# Altium PCB ╨Р╨С╨Т╨У.201905.010.PcbDoc
Units mm, origin at the board's own origin, x right, y up, seen from the top; angles counter-clockwise.
Board outline 57.4 x 29.78 mm, 2 copper layers (Top Layer, Bottom Layer), stack 1.569 mm thick; 24 components, 19 nets, 77 pads, 22 vias.
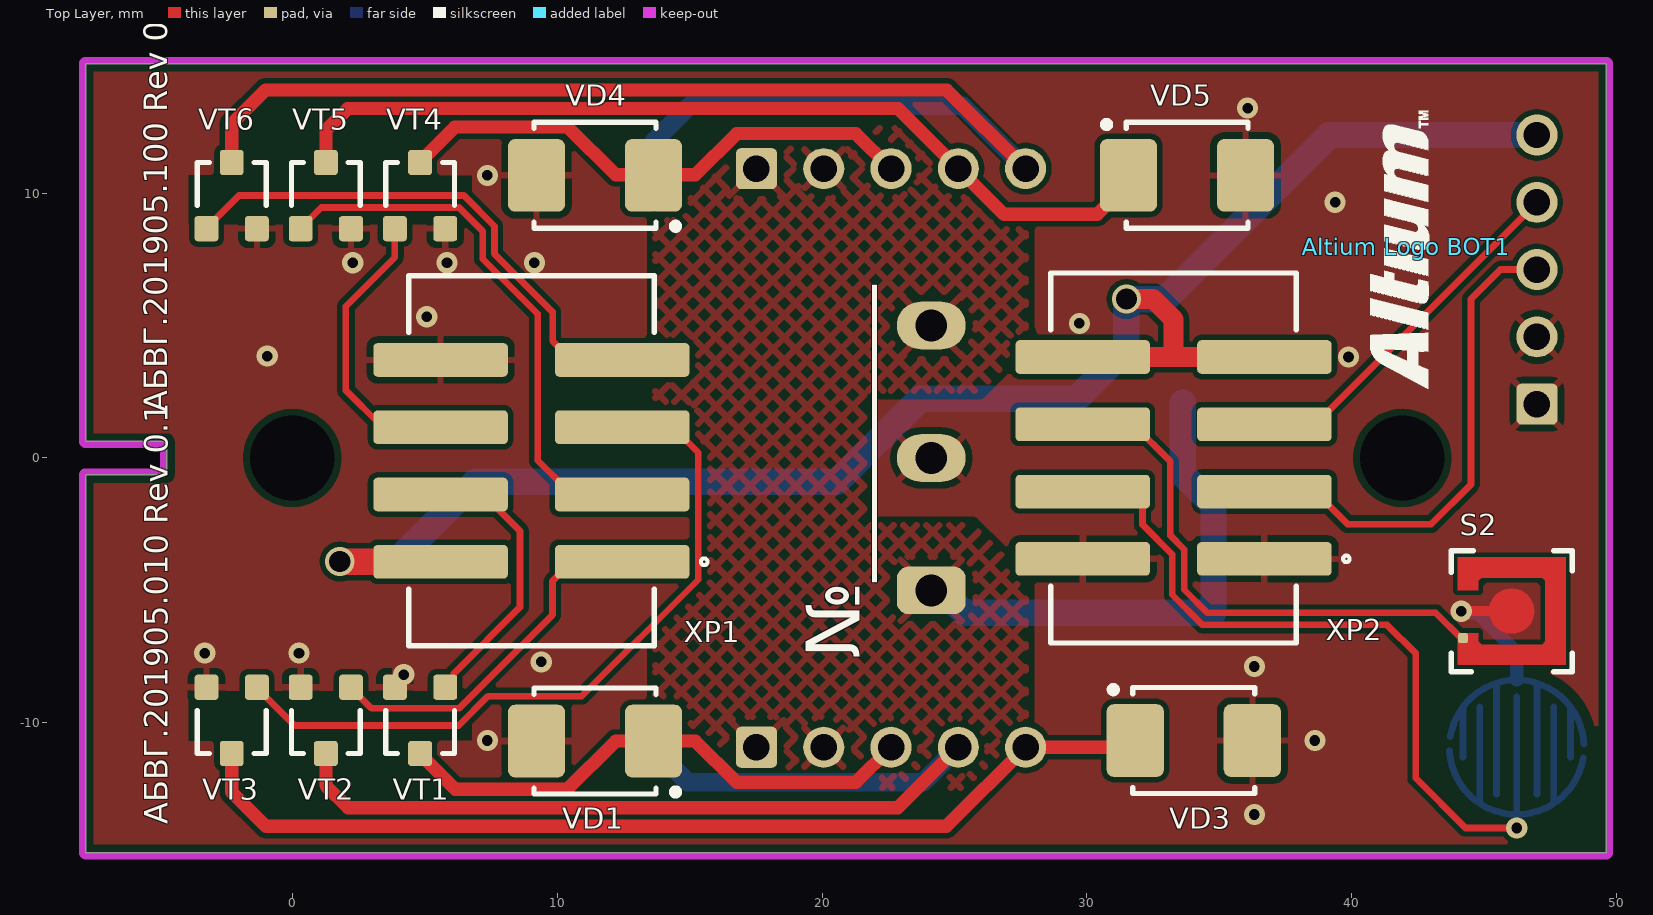
[diagram p0: Top Layer view]
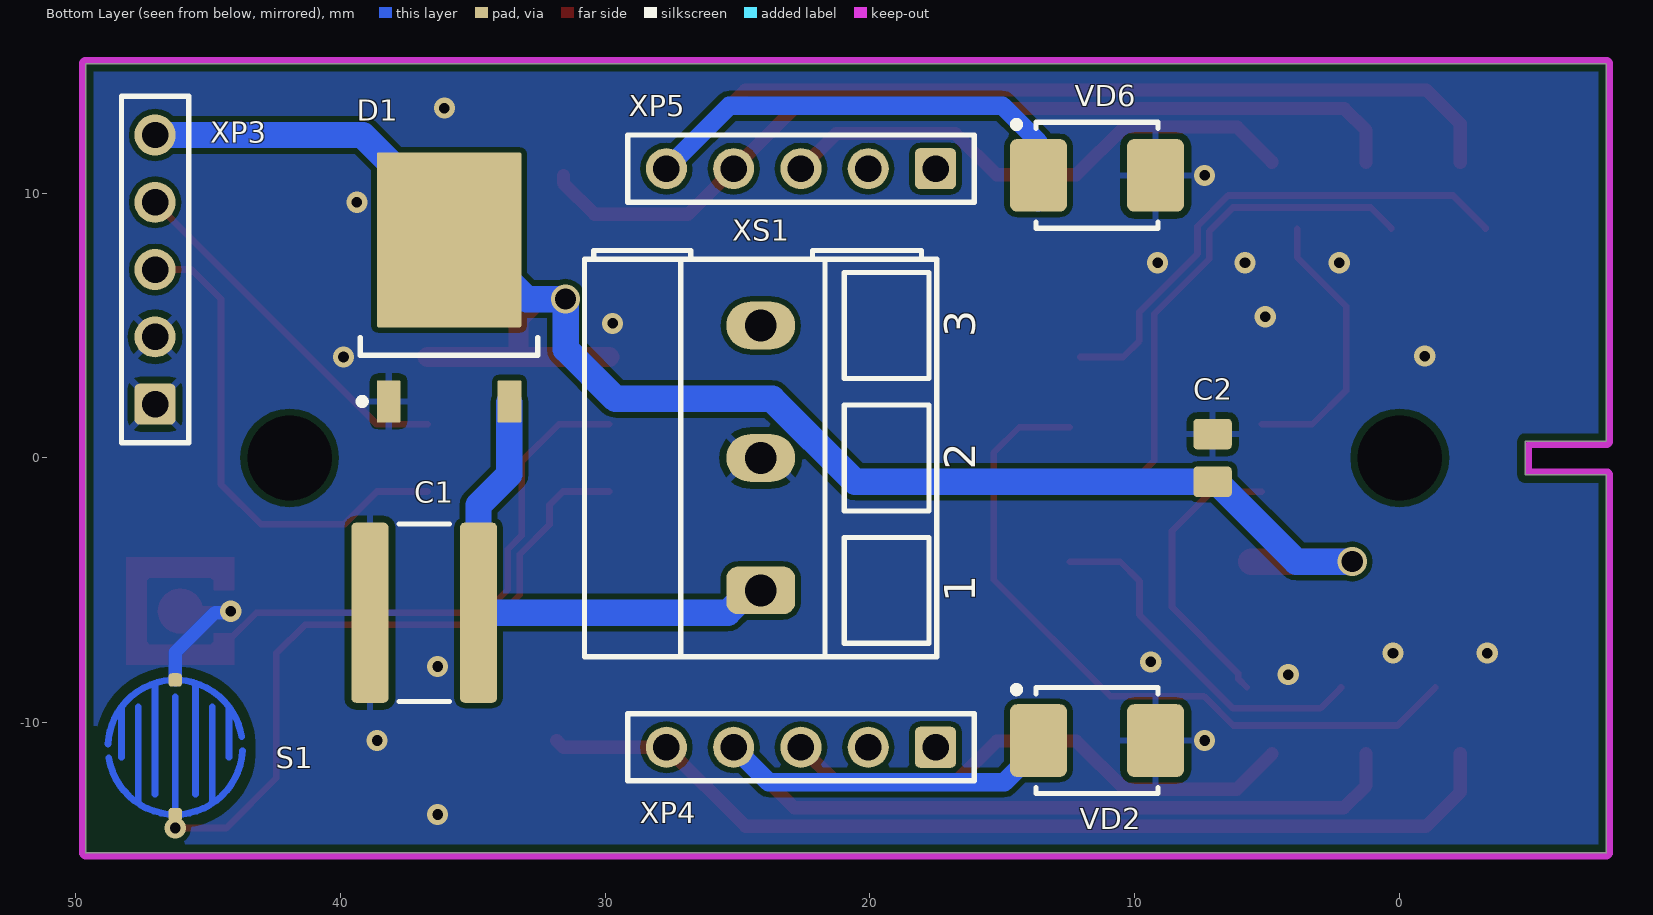
[diagram p1: Bottom Layer view, seen from below]
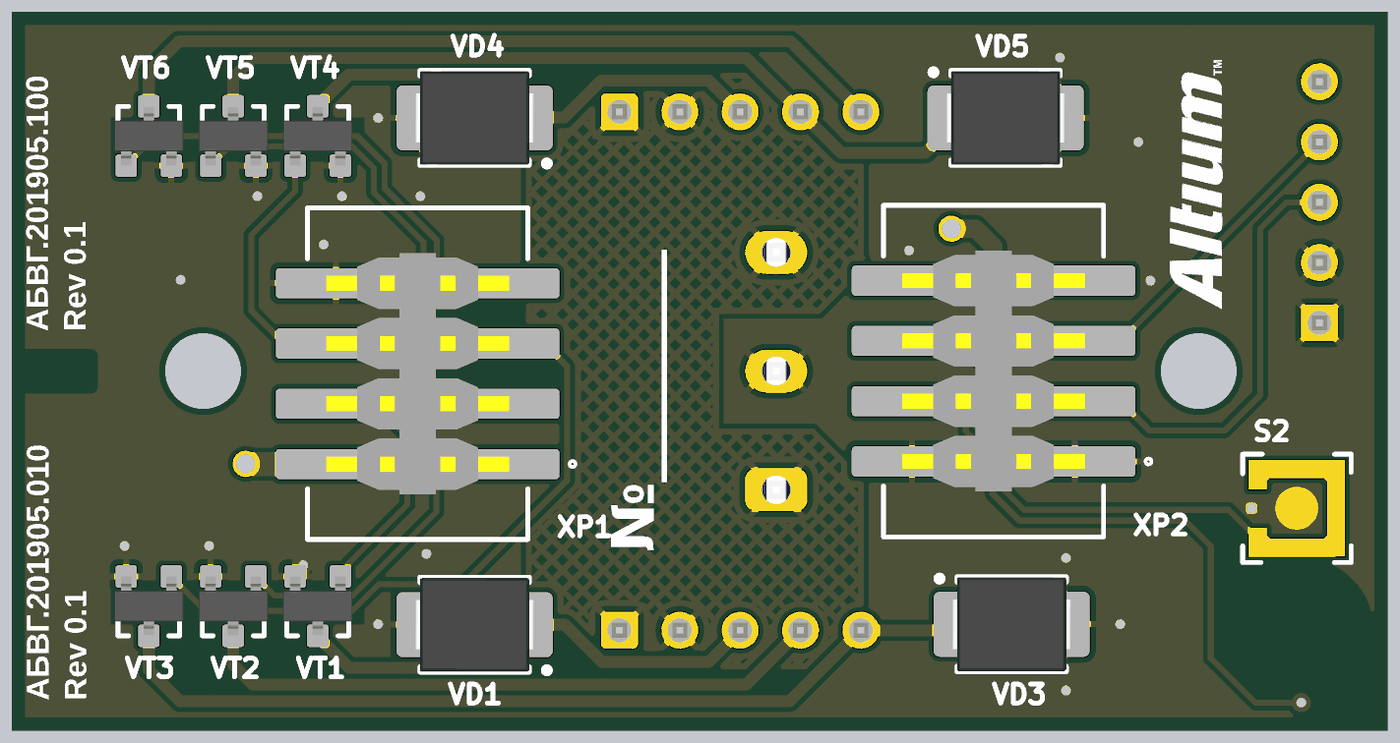
[diagram p2: 3D render of the assembled board from above, using the file's embedded part models]
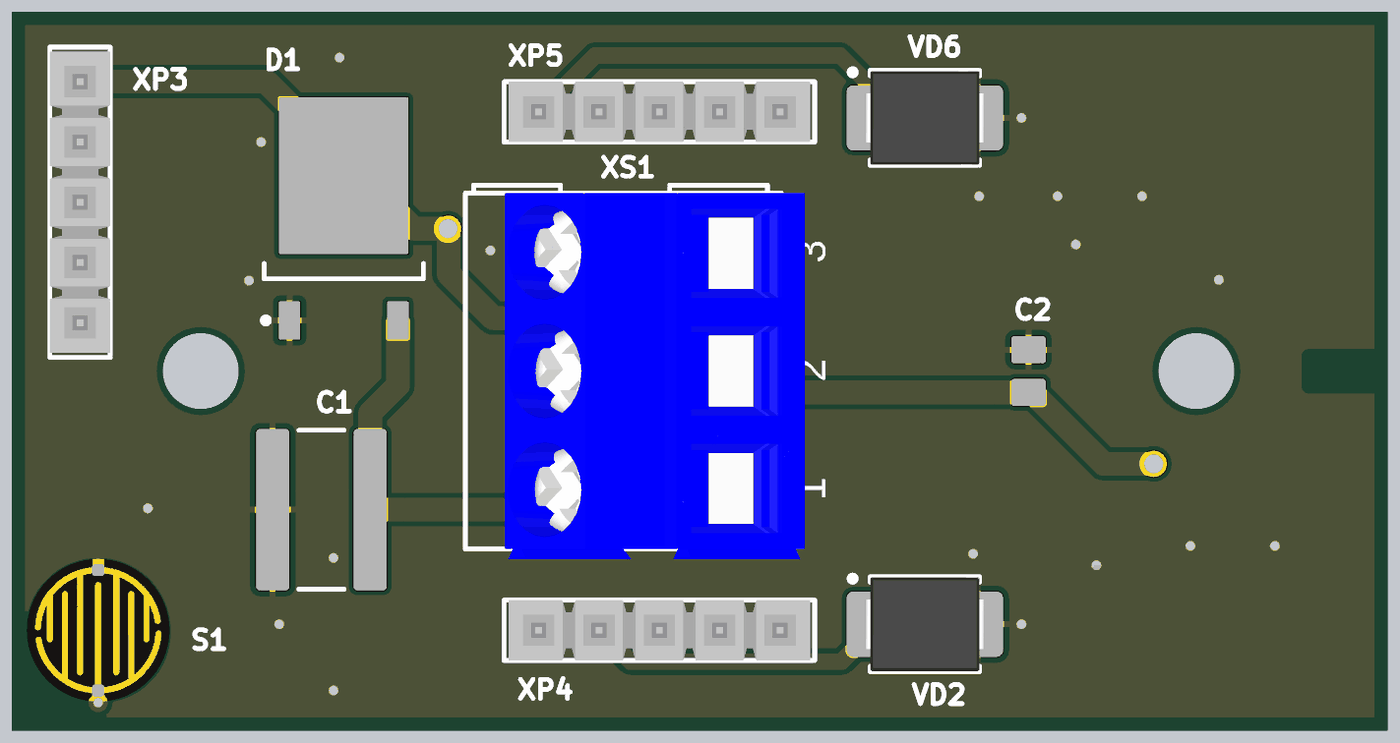
[diagram p3: 3D render of the assembled board from below, using the file's embedded part models]

## Layer stack, top to bottom
Top Solder: solder mask 0.0102, Solder Resist, Dk 3.5
Top Layer: signal copper 0.035
Dielectric 1: core 1.4986, Core-043, Dk 4.3
Bottom Layer: signal copper 0.035
Bottom Solder: solder mask 0.0102, Solder Resist, Dk 3.5

## Board outline
49.6,-14.899 49.608,0 49.608,14.883 -7.796,14.883 -7.796,0.627 -4.729,0.627 -4.729,-0.643 -7.796,-0.643 -7.796,-14.899

## Design rules (kind name [scope] priority, off if disabled: settings)
AssemblyTestPointUsage [All] p1 off:
AssemblyTestpoint [All] p1 off: testpointundercomponent=TRUE minsize=1.016 maxsize=2.54 preferedsize=1.524 minholesize=0 maxholesize=1.016 preferedholesize=0.813 testpointgrid=0.025 usegrid=TRUE gridtolerance=0 allowsidetop=TRUE allowsidebottom=TRUE
BoardOutlineClearance [All] p1: gap=0.25 ignorepadtopadclearanceinfootprint=FALSE except(0: Arc-SplitContinuation Track-SplitContinuation SMDPad-SplitContinuation THPad-SplitContinuation Via-SplitContinuation Fill-SplitContinuation Poly-SplitContinuation Region-SplitContinuation Text-SplitContinuation; 0.3: Poly-OutlineEdge)
Clearance "Clearance-All_1Oz (35mkm)" [All] p1: gap=0.2 ignorepadtopadclearanceinfootprint=TRUE except(0.25: Arc-Hole Track-Hole SMDPad-Hole THPad-Hole Via-Hole Fill-Hole Poly-Hole Region-Hole Text-Hole) // Общий зазор для фольги 35 мкм
ComponentClearance ComponentClearance_0.25mm [All] p1: gap=0.25 collisioncheckmode=3 verticalgap=0.25 showdistances=FALSE
DiffPairsRouting [All] p1 off: maxlimit=0.254 minlimit=0.254 mostfreqgap=0.254 toplayer_minwidth=0.381 toplayer_maxwidth=0.381 toplayer_prefwidth=0.381 bottomlayer_minwidth=0.381 bottomlayer_maxwidth=0.381 bottomlayer_prefwidth=0.381 maxuncoupledlength=12.7
FabricationTestPointUsage [All] p1 off: valid=0 allowmultiple=FALSE
FabricationTestpoint [All] p1 off: side=3 testpointundercomponent=TRUE minsize=1.016 maxsize=2.54 preferedsize=1.524 minholesize=0 maxholesize=1.016 preferedholesize=0.813 testpointgrid=0.025 allowsidetop=TRUE allowsidebottom=TRUE usegrid=TRUE gridtolerance=0
HoleSize [All] p1: absolutevalues=TRUE maxlimit=5 minlimit=0.3 maxpercent=80.000 minpercent=20.000
HoleToHoleClearance [All] p1: gap=0.25 allowstackedmicrovias=TRUE
MinimumSolderMaskSliver [All] p1: minsoldermaskwidth=0.25
NetAntennae [InComponent('S1')] p1: netantennaetolerance=10
PasteMaskExpansion [All] p1 off: expansion=0
PlaneClearance [All] p1 off: clearance=0.508
PlaneConnect [All] p1 off: planeconnectstyle=Relief reliefexpansion=0.508 reliefentries=4 reliefconductorwidth=0.254 reliefairgap=0.254
PolygonConnect PolygonConnect_All [All] p1: thpad.connectstyle=Relief thpad.reliefconductorwidth=0.25 thpad.reliefentries=4 thpad.polygonreliefangle="45 Angle" thpad.airgapwidth=0.25 smdpad.connectstyle=Relief smdpad.reliefconductorwidth=0.25 smdpad.reliefentries=4 smdpad.polygonreliefangle="90 Angle" smdpad.airgapwidth=0.25 via.connectstyle=Direct via.reliefconductorwidth=0.254 via.reliefentries=4 via.polygonreliefangle="90 Angle" via.airgapwidth=0.254
RoomDefinition Stabilizer [InComponentClass('Stabilizer')] p1: confinementstyle=ConfineIn formatcopy=TRUE lockcomponents=TRUE outline 5.793,-2.025 5.793,2.025 15.1,2.025 15.1,8.525 31.966,8.525 31.966,12.257 39.816,12.257 39.816,-1.917 40.105,-1.917 40.105,-9.767 33.555,-9.767 33.555,-8.775 15.1,-8.775 15.1,-2.025
RoutingCorners [All] p1 off: cornerstyle=45-Degree minsetback=2.5 maxsetback=2.5
RoutingPriority [All] p1 off: routingpriority=0
RoutingVias [All] p1: holewidth=0.305 width=0.559 viastyle="Through Hole" minholewidth=0.305 minwidth=0.559 maxholewidth=0.711 maxwidth=1.27 useviatemplates=TRUE viatemplateguid#1={DFEAECEF-EB07-48F7-AC79-42AC97957FC0} viatemplateguid#2={1BCE533F-170D-4028-B366-33B5D49D47F2} viatemplatename#1=v80h40m0mx0(Tol0-13) viatemplatename#2=v110h80(Tol10-10)
SilkToSilkClearance [All] p1: silktosilkclearance=0.2
SilkToSolderMaskClearance [IsPad] p1: minsilkscreentomaskgap=0.25 clearancetoexposedcopper=TRUE
SolderMaskExpansion [All] p1: expansion=0.05
Width Width_S1_0.254 [InComponent('S1') Or InComponent('S2')] p1: maxlimit=0.4 minlimit=0.254 preferedwidth=0.254 // Исключение правила ширины проводника цепи GND
Width Width_NetClass(Power)_1.0mm [InNetClass('Power')] p2: maxlimit=1 minlimit=0.5 preferedwidth=1 // Ширина проводников для класса цепей Power
Width Width_NetClass(LOAD)_0.7mm [InNetClass('Load')] p3: maxlimit=0.7 minlimit=0.5 preferedwidth=0.5 // Ширина проводников для класса цепей LOAD
Width Width_InNetClass(PWN)_0.25mm [InNetClass('PWMN_[0..2]')or(InNetClass('PWMP_[0..2]'))] p4: maxlimit=0.25 minlimit=0.25 preferedwidth=0.25 // Ширина проводников для классов цепей PWN
Width "Width-All_1Oz (35mkm)" [All] p5: maxlimit=10 minlimit=0.15 preferedwidth=0.2 // Общая ширина проводника для фольги 35 мкм
13 further rules are at their usual default settings.

## Classes and differential pairs
component class Stabilizer: C1 C2 D1 XS1
net class Load: NetVD1_1 NetVD2_1 NetVD3_1 NetVD4_1 NetVD5_1 NetVD6_1
net class Power: GND VCC VIN
net class PWMP_[0..2]: PWMP0 PWMP1 PWMP2 PWMP_0 PWMP_1 PWMP_2
net class PWMN_[0..2]: PWMN0 PWMN1 PWMN2 PWMN_0 PWMN_1 PWMN_2

## Components (designator, comment, footprint, x,y, rotation, side; value= is the part's Value field where it differs from the comment)
"Altium Logo BOT1" "Altium(2009)" LOGO-ALTIUM-NEW 42.05,7.975 r90 top
C1 "1825 1 uF 25 V ±10 %  X7R" CAPC1825(4564)220_N 36.83,-5.842 r0 bottom value=1uF
C2 "220nF 6.3V 0805(2012)" CAPC0805(2012)100_N 7.068,0 r270 bottom value=220nF
D1 "LM1117DTX-5.0/NOPB" NDP0003B_L 35.891,6.432 r90 bottom
S1 "KNOPKA" ELASTO_5.08MM 46.228,-10.922 r180 bottom
S2 "KNOPKA_2" DOME_SQ04200N 46.042,-5.784 r180 top
VD1 "P6SMB27AT3G" ONSC-SMB-2-403A-03_J_V 11.43,-10.687 r180 top
VD2 "P6SMB27AT3G" ONSC-SMB-2-403A-03_J_V 11.43,-10.668 r180 bottom
VD3 "P6SMB27AT3G" ONSC-SMB-2-403A-03_J_V 34.036,-10.668 r0 top
VD4 "P6SMB27AT3G" ONSC-SMB-2-403A-03_J_V 11.43,10.668 r180 top
VD5 "P6SMB27AT3G" ONSC-SMB-2-403A-03_J_V 33.782,10.668 r0 top
VD6 "P6SMB27AT3G" ONSC-SMB-2-403A-03_J_V 11.43,10.668 r180 bottom
VT1 "AO3400A" AO-SOT23-3_V 4.826,-9.906 r180 top
VT2 "AO3400A" AO-SOT23-3_V 1.27,-9.906 r180 top
VT3 "AO3400A" AO-SOT23-3_V -2.286,-9.906 r180 top
VT4 "AO3400A" AO-SOT23-3_V 4.826,9.906 r0 top
VT5 "AO3400A" AO-SOT23-3_V 1.27,9.906 r0 top
VT6 "AO3400A" AO-SOT23-3_V -2.286,9.906 r0 top
XP1 "TSM-104-04-T-DV" TSM-104-04-T-DV 9.03,-0.11 r90 top
XP2 "TSM-104-04-T-DV" TSM-104-04-T-DV 33.274,0 r90 top
XP3 "TSW-105-05-T-S" SMTC-TSW-105-05-X-S 46.99,2.032 r90 bottom
XP4 "TSW-105-05-T-S" SMTC-TSW-105-05-X-S 17.526,-10.922 r0 bottom
XP5 "TSW-105-05-T-S" SMTC-TSW-105-05-X-S 17.526,10.922 r0 bottom
XS1 "691213710003" ETB15-3 24.125,0 r90 bottom

## Footprints (in the part's own frame and the unit in brackets; to place one, negate y for a bottom-side part, rotate by r counter-clockwise, add the part's x,y. Pads: shape width x height; smd on the part's side, far side on the other; paste and mask are expansions set on the pad)
AO-SOT23-3_V [mm]
  rrect25% 0.9x0.95 smd: D(0,1.25) G(-0.95,-1.25) S(0.95,-1.25)
  silkscreen extent -1.3,-0.38 1.3,1.25, body extent -1.46,-1.25 1.46,1.23, height 1.02
CAPC0805(2012)100_N [mm]
  rrect25% 1.15x1.45 smd: 1(-0.9,0) 2(0.9,0)
  body extent -1.1,-0.72 1.1,0.73, height 1
CAPC1825(4564)220_N [mm]
  rrect25% 1.4x6.8 smd: 1(-2.05,0) 2(2.05,0)
  silkscreen extent -0.95,-3.35 0.95,3.35, body extent -2.4,-3.4 2.4,3.4, height 2.2
DOME_SQ04200N [mm]
  rrect50% 0.38x0.38 smd paste-0.38: 1(1.905,0) 2(1.841,1.016)
  Top Layer region: -0.845,-0.004 -0.731,0.421 -0.42,0.732 0.005,0.846 0.43,0.732 0.741,0.421 0.855,-0.004 0.855,-0.004 0.771,-0.373 0.535,-0.669 0.194,-0.833 -0.184,-0.833 -0.525,-0.669 -0.761,-0.373 -0.845,-0.004
  Top Layer region: -2.03,2.03 -2.03,-2.03 2.032,-2.03 2.032,-0.794 1.27,-0.794 1.27,-1.143 1.143,-1.27 -1.143,-1.27 -1.27,-1.143 -1.27,1.143 -1.143,1.27 1.143,1.27 1.27,1.143 1.27,0.826 2.032,0.826 2.032,2.032
  Top Layer lines w0.38: 1.905,0 0,0
  silkscreen extent -2.28,-2.28 2.28,2.28
ELASTO_5.08MM [mil]
  rrect50% 20x20 smd: 1(0,100) 2(0,-100)
  Top Layer region: -10,185
  Top Layer region: 0,0
  Top Layer region: -99.88,4.99
  Top Layer lines w10: 99.88,-4.99 cw(c0,0) 0,-100 ; 98.78,15.6 ccw(c0,0) 80,60 ; 80,-15 80,60 ; 55,-80 55,60 ; 30,-70 30,95 ; 0,75 0,-100 ; -30,-70 -30,95 ; -55,-80 -55,60 ; -80,-15 -80,60 ; -98.78,-15.6 ccw(c0,0) 0,-100 ; -99.88,4.99 cw(c0,0) -80,60 ; 80,60 ccw(c0,0) -80,60
  Multi-Layer pour cut-out: -120,-5 -120,0 -110.87,45.92 -84.85,84.85 -45.92,110.87 0,120 0,120 45.92,110.87 84.85,84.85 110.87,45.92 120,0 120,0 120,-5 111.25,-49.01 86.32,-86.32 49.01,-111.25 5,-120 5,-120 -5,-120 -49.01,-111.25 -86.32,-86.32 -111.25,-49.01 -120,-5
ETB15-3 [mm]
  rrect50% 1.8x2.6 hole 1.2: 1(-5,0)
  oval 1.8x2.6 hole 1.2: 2(0,0) 3(5,0)
  silkscreen extent -7.5,-6.65 7.83,6.65, body extent -7.93,-7.65 7.5,5, height 15.45
LOGO-ALTIUM-NEW [mm]
  silkscreen extent -5.36,-0.87 5.14,1.36
NDP0003B_L [mm] "D-PAK, 4-Leads, Body 6.1x6.6mm, Pitch 2.29mm, Lead Span 9.7mm, IPC High Density"
  rrect11% 1.6x0.9 smd: 1(-4.3,2.28) 3(-4.3,-2.28)
  rrect2% 6.6x5.45 smd: 4(1.8,0)
  silkscreen extent -4.42,-3.35 -1.9,3.4, body extent -2.55,-3.35 3.65,3.35, height 2.38
ONSC-SMB-2-403A-03_J_V [mm]
  rrect25% 2.159x2.743 smd: 1(-2.21,0) 2(2.21,0)
  silkscreen extent -3.16,-2 2.3,2.05, body extent -2.52,-1.97 2.52,1.98, height 2.47
SMTC-TSW-105-05-X-S [mm]
  rrect25% 1.55x1.55 hole 1: 1(0,0)
  round 1.55 hole 1: 2(2.54,0) 3(5.08,0) 4(7.62,0) 5(10.16,0)
  silkscreen extent -1.46,-1.27 11.62,1.27, body extent -1.27,-1.27 11.43,1.27, height 5.21
TSM-104-04-T-DV [mm]
  rrect25% 1.27x5.08 smd: 1(-3.81,-3.43) 2(-3.81,3.43) 3(-1.27,-3.43) 4(-1.27,3.43) 5(1.27,-3.43) 6(1.27,3.43) 7(3.81,-3.43) 8(3.81,3.43)
  silkscreen extent -6.98,-6.65 6.98,4.63, body extent -5.08,-3.85 5.08,3.85, height 6.86

## Part data
"Altium Logo BOT1": library part CMP-9999-00125-1, "Alitum Logo"
C1: library part VJ1825Y105KXXAT, "Керамический чип-конденсатор", Case/Package=1825, Dielectric=X7R, Manufacturer=Vishay, Max Operating Temperature=150°C, Min Operating Temperature=-55°C, Tolerance=10%, Voltage Rating=25V, ClassName=Stabilizer, ComponentLink2Description=http://datasheet.octopart.com/VJ1825Y105KXXAT-Vishay-datasheet-14932079.pdf, ComponentLink2URL=http://datasheet.octopart.com/VJ1825Y105KXXAT-Vishay-datasheet-14932079.pdf, Depth=6.4mm, Lead Free="Lead Free", Length=4.5mm, Manufacturer Part Number=VJ1825Y105KXXAT, Mount="Surface Mount", Stock 1=0, Supplier 1=Avnet, Supplier Part Number 1=VJ1825Y105KXXAT, Voltage Rating (DC)=25V
C2: library part LLM215R70J224MA11L, "Керамический чип-конденсатор", Case/Package=0805, Case Code (Metric)=2012, Dielectric=X7R, Manufacturer=Murata, Max Operating Temperature=125°C, Min Operating Temperature=-55°C, Package Quantity=1, Supplier Part Number 1=81-LLM215R70J224MA1L, Tolerance=20%, Voltage Rating=6.3V, Case Code (Imperial)=0805, ClassName=Stabilizer, ComponentLink9Description=http://datasheet.octopart.com/LLM215R70J224MA11L-Murata-datasheet-11978611.pdf, ComponentLink9URL=http://datasheet.octopart.com/LLM215R70J224MA11L-Murata-datasheet-11978611.pdf, Depth=1.25mm, Height=0.5mm, Lead Free="Lead Free", Length=2mm, Manufacturer Part Number=LLM215R70J224MA11L, Mount="Surface Mount", Packaging="Tape and Reel", Radiation Hardening=No, Stock 1=3598, Supplier 1=Mouser, Termination=SMD/SMT, Thickness=0.022inch, Voltage Rating (DC)=6.3V, Width=0.049inch
D1: "LDO Regulator Pos 5V 0.8A 3-Pin(2+Tab) TO-252 T/R", Case/Package=TO-252, Dropout Voltage=1.2V, Manufacturer="TI National Semiconductor", Max Input Voltage=15V, Max Operating Temperature=125°C, Max Output Current=800mA, Min Operating Temperature=-40°C, Nominal Output Voltage=5V, Output Voltage Accuracy=1%, Package Quantity=2500, Quiescent Current=10mA, Accuracy=1%, ClassName=Stabilizer, ComponentLink1Description=https://datasheet.ciiva.com/39121/1280534-39121523.pdf?src-supplier=Jameco, ComponentLink1URL=https://datasheet.ciiva.com/39121/1280534-39121523.pdf?src-supplier=Jameco, Contact Plating=Tin, Lead Free="Lead Free", Manufacturer Part Number=LM1117DTX-5.0/NOPB, Min Current Limit=800mA, Mount="Surface Mount", Number of Outputs=1, Number of Pins=3, Number of Regulators=1, Output Current=800mA, Output Type=Fixed, Output Voltage=5V, Packaging="Tape and Reel", Polarity=Positive, Radiation Hardening=No, REACH SVHC="No SVHC", Stock 1=2500, Supplier 1=Arrow, Supplier Part Number 1=LM1117DTX-5.0/NOPB
S1 S2: Manufacturer Part Number=Сенсор
VD1 VD2 VD3 VD4 VD5 VD6: "TVS DIODE 23.1V 37.5V SMB", Breakdown Voltage=27V, Case/Package=SMB, Clamping Voltage=37.5V, Current Rating=16A, Leakage Current=5uA, Manufacturer="ON Semiconductor", Max Breakdown Voltage=28.4V, Max Operating Temperature=150°C, Min Breakdown Voltage=25.7V, Min Operating Temperature=-65°C, Operating Supply Voltage=23.1V, Package Quantity=1, Peak Pulse Power=600W, Power Line Protection=No, Test Current=1mA, ComponentLink1Description=https://datasheet.ciiva.com/3021/p6smb6-8at3-d-3021361.pdf?src-supplier=Avnet, ComponentLink1URL=https://datasheet.ciiva.com/3021/p6smb6-8at3-d-3021361.pdf?src-supplier=Avnet, Composition=Zener, Contact Plating=Tin, Depth=3.56mm, Direction=Unidirectional, Element Configuration=Single, ESD Protection=Yes, Height=2.13mm, Lead Free="Lead Free", Length=4.32mm, Manufacturer Part Number=P6SMB27AT3G, Max Reverse Leakage Current=5uA, Max Surge Current=16A, Number of Channels=1, Number of Elements=1, Number of Pins=2, Number of Unidirectional Channels=1, Packaging="Tape and Reel", Peak Pulse Current=16A, Polarity=Unidirectional, Power Dissipation=600W, Radiation Hardening=No, REACH SVHC="No SVHC", Reverse Breakdown Voltage=25.7V, Reverse Standoff Voltage=23.1V, Stock 1=0, Supplier 1=Avnet, Supplier Part Number 1=P6SMB27AT3G, Termination=SMD/SMT, Voltage Rating (DC)=27V, Width=3.56mm
VT1 VT2 VT3 VT4 VT5 VT6: "MOSFET N-CH 30V 5.7A SOT23", Case/Package=SOT-23, Continuous Drain Current (ID)=5.7A, Drain to Source Voltage (Vdss)=30V, Gate to Source Voltage (Vgs)=12V, Input Capacitance=630pF, Manufacturer="Alpha & Omega Semiconductor", Max Operating Temperature=150°C, Max Power Dissipation=1.4W, Min Operating Temperature=-55°C, Supplier Part Number 1=785-1000-1-ND, ComponentLink1Description=https://datasheet.ciiva.com/940/ao3400a-940739.pdf?src-supplier=Digi-Key, ComponentLink1URL=https://datasheet.ciiva.com/940/ao3400a-940739.pdf?src-supplier=Digi-Key, Lead Free="Lead Free", Manufacturer Part Number=AO3400A, Mount="Surface Mount", Number of Elements=1, Number of Pins=3, Packaging="Tape and Reel", Power Dissipation=1.4W, Radiation Hardening=No, Rds On Max=26.5mR, Stock 1=660154, Supplier 1=Digi-Key
XP1 XP2: "SAMTEC  Board-To-Board Connector,  / TSM Series, 8 Contacts, Header, 2.54 mm, / Surface Mount, 2 Rows", Manufacturer=Samtec, Manufacturer Part Number=TSM-104-04-T-DV.1, Supplier Part Number 1=200-TSM10404TDV, ComponentLink1Description=http://www.farnell.com/datasheets/1927672.pdf?src-supplier=Farnell, ComponentLink1URL=http://www.farnell.com/datasheets/1927672.pdf?src-supplier=Farnell, ComponentLink2Description=http://www.samtec.com/documents/webfiles/pdf/TSM.PDF?src-supplier=Avnet+Europe, ComponentLink2URL=http://www.samtec.com/documents/webfiles/pdf/TSM.PDF?src-supplier=Avnet+Europe, ComponentLink3Description=http://www.samtec.com/documents/webfiles/pdf/TSM.PDF?src-supplier=Avnet, ComponentLink3URL=http://www.samtec.com/documents/webfiles/pdf/TSM.PDF?src-supplier=Avnet, Contact Material=Bronze, Contact Plating=Tin, Gender=Male, Lead Free="Lead Free", Mount="Surface Mount", Number of Contacts=8, Number of Rows=2, Packaging=Bulk, Pitch=2.54mm, Radiation Hardening=No, REACH SVHC="No SVHC", Stock 1=283, Supplier 1=Mouser, Termination=Solder
XP3 XP4 XP5: "TSW - Samtec 2.54mm Pin Header 13.46mm Overall Pin Length 5.08mm Tail (08)", Color=Black, Manufacturer=Samtec, Max Current Rating=7.6A, Max Operating Temperature=125°C, Max Voltage Rating (AC)=550V, Min Operating Temperature=-55°C, Package Quantity=1, Supplier Part Number 1=200-TSW10508SD, ComponentLink4Description=http://datasheet.octopart.com/TSW-105-08-S-D-Samtec-datasheet-97325576.pdf?src-supplier=Samtec, ComponentLink4URL=http://datasheet.octopart.com/TSW-105-08-S-D-Samtec-datasheet-97325576.pdf?src-supplier=Samtec, Connector Type="Male Pin", Contact Material=Bronze, Contact Mating Length=0.23inch, Contact Plating=Gold, Depth=5.08mm, Gender=Male, Housing Color=Black, Housing Material=Polyester, Lead Free="Lead Free", Length=12.7mm, Manufacturer Part Number=TSW-105-05-T-S, Manufaturer Part Number=TSW-105-05-T-S, Mount="Through Hole", Number of Contacts=10, Number of Positions=10, Number of Rows=2, Orientation=Straight, Packaging=Bulk, Pitch=2.54mm, Radiation Hardening=No, Row Spacing=0.1inch, Stock 1=162, Supplier 1=Mouser, Termination=Solder, Width=5.08mm
XS1: "TERM BLK 5MM HORZ ENTRY MOD 3P", Color=Green, Current=10A, Manufacturer="Wurht Electronics", Max Operating Temperature=105°C, Min Operating Temperature=-40°C, Package Quantity=1300, Supplier Part Number 1=732-2039-ND, Voltage=300V, ClassName=Stabilizer, ComponentLink1Description=https://datasheet.ciiva.com/824/6912137100xx-824134.pdf?src-supplier=Digi-Key, ComponentLink1URL=https://datasheet.ciiva.com/824/6912137100xx-824134.pdf?src-supplier=Digi-Key, Connector Type=PCB, Contact Material=Brass, Contact Plating=Brass, Height=10mm, Housing Material=Nylon, Lead Pitch=5mm, Length=8.3mm, Manufacturer Part Number=691213710003, Mount="Through Hole", Number of Contacts=3, Number of Levels=1, Number of Positions Per Level=3, Packaging=Bulk, Pitch=0.197inch, Plating=Brass, REACH SVHC=Unknown, Stock 1=1324, Stripping Length=-7mm, Supplier 1=Digi-Key, Termination=Screw, Width=15.6mm, Wire/Cable Gauge=16AWG, Wire Gauge (Max)=26AWG, Wire Gauge (Min)=16AWG

## Free pads (board coordinates)
  round 1.524 hole 3.2 unplated: MT1(0,0) MT2(41.91,0)

## Via types
v1: diameter 0.8, hole 0.4, Top Layer to Bottom Layer, tented both sides, 20 vias
v2: diameter 1.1, hole 0.8, Top Layer to Bottom Layer, 2 vias

## Nets (pads, with @x,y where several pads share a name; then routed paths per layer and width w, separated by ;. In a path a pad name is that pad's centre, name@x,y a point inside that pad or via, vN(x,y) a via of type N, cw(c..) or ccw(c..) an arc to the next point about the centre after c; other vN are vias at no path point)
GND: C1.2 C2.1 D1.1 S1.1 S2.1 VD1.2 VD2.2 VD3.2 VD4.2 VD5.2 VD6.2 VT1.S VT2.S VT3.S VT4.S VT5.S VT6.S XP1.8 XP2.1 XP2.2 XP3.1 XP3.2 XS1.2 | length 3.8
  Bottom Layer w0.5: v1(44.137,-5.784) 44.194,-5.841 44.729,-5.841 46.228,-7.341 S1.1
  other v1: 36.322,-13.462 7.366,-10.668 38.608,-10.668 4.214,-8.181 36.322,-7.874 9.4,-7.7 -3.302,-7.366 0.254,-7.366 39.878,3.81 -0.944,3.845 29.718,5.08 5.08,5.334 2.286,7.366 5.842,7.366 9.144,7.366 39.37,9.652 7.366,10.668 36.068,13.208
NetVD1_1: VD1.1 VT1.D XP4.3 | length 20.3
  Top Layer w0.5: VT1.D 4.826,-11.181 6.154,-12.508 10.392,-12.508 12.213,-10.687 VD1.1@13.627,-10.687 ; VD1.1 15.218,-10.687 16.778,-12.247 21.281,-12.247 XP4.3
NetVD2_1: VD2.1 VT2.D XP4.4 | length 39.3
  Top Layer w0.5: VT2.D 1.27,-12.369 2.11,-13.208 22.86,-13.208 XP4.4
  Bottom Layer w0.7: VD2.1 13.64,-10.96 14.927,-12.247 23.821,-12.247 XP4.4
NetVD3_1: VD3.1 VT3.D XP4.5 | length 37.4
  Top Layer w0.5: VT3.D -2.286,-12.614 -0.992,-13.908 24.7,-13.908 XP4.5 31.572,-10.922 VD3.1
NetVD4_1: VD4.1 VT4.D XP5.3 | length 20.3
  Top Layer w0.5: VT4.D 4.832,11.162 4.832,11.187 6.135,12.49 10.41,12.49 12.213,10.687 VD4.1@13.627,10.687 ; VD4.1@13.64,10.687 15.218,10.687 16.778,12.247 21.281,12.247 XP5.3
NetVD5_1: VD5.1 VT5.D XP5.4 | length 34.3
  Top Layer w0.5: VT5.D 1.27,12.369 2.091,13.189 22.879,13.189 XP5.4 26.868,9.2 30.396,9.2 31.572,10.376 VD5.1
NetVD6_1: VD6.1 VT6.D XP5.5 | length 51.1
  Top Layer w0.5: VT6.D -2.286,12.614 -1.011,13.889 24.719,13.889 XP5.5
  Bottom Layer w0.7: VD6.1@13.64,9.652 13.64,11.94 15,13.3 25.308,13.3 XP5.5
PWMN_0: VT4.G XP1.6 | length 10.6
  Top Layer w0.25: VT4.G 3.876,7.576 2.025,5.725 2.025,2.546 3.301,1.27 XP1.6@5.206,1.27
PWMN_1: VT5.G XP1.3 | length 20.4
  Top Layer w0.25: VT5.G 0.32,8.681 1.095,9.456 6.295,9.456 7.188,8.563 7.188,7.518 9.271,5.436 9.271,-0.096 10.445,-1.27 XP1.3@12.066,-1.27
PWMN_2: VT6.G XP1.7 | length 19.6
  Top Layer w0.25: VT6.G -3.236,8.681 -2.011,9.906 6.481,9.906 7.638,8.749 7.638,7.705 9.83,5.513 9.83,4.42 10.439,3.81 XP1.7@12.066,3.81
PWMP_0: VT1.G XP1.4 | length 11.1
  Top Layer w0.25: XP1.4@5.206,-1.27 7.111,-1.27 8.6,-2.759 8.6,-5.633 6.101,-8.132 6.101,-8.331 VT1.G
PWMP_1: VT2.G XP1.1 | length 13.6
  Top Layer w0.25: VT2.G 2.22,-8.681 2.995,-9.456 6.295,-9.456 9.825,-5.926 9.825,-4.65 10.555,-3.92 XP1.1
PWMP_2: VT3.G XP1.5 | length 27.6
  Top Layer w0.25: VT3.G -1.336,-8.681 0.085,-10.102 6.285,-10.102 7.397,-8.99 10.931,-8.99 15.325,-4.597 15.325,0.2 14.365,1.16 XP1.5
RXD: XP2.5 XP3.4 | length 13.8
  Top Layer w0.254: XP2.5 38.609,1.27 XP3.4
S0: S1.2 XP2.4 | length 26.2
  Top Layer w0.254: XP2.4 31.593,-1.27 32.098,-1.776 32.098,-2.52 33.221,-3.643 33.221,-5.163 34.358,-6.3 41.338,-6.3 42.418,-7.38 42.418,-12.093 44.295,-13.97 v1(46.228,-13.97)
  Bottom Layer w0.254: v1(46.228,-13.97) S1.2
S1: S2.2 XP2.6 | length 20.2
  Top Layer w0.254: XP2.6 31.75,1.27 33.15,-0.13 33.15,-2.929 33.675,-3.454 33.675,-4.975 34.546,-5.846 43.17,-5.846 44.124,-6.8 S2.2
TXD: XP2.3 XP3.3 | length 18.9
  Top Layer w0.254: XP2.3 38.609,-1.27 39.839,-2.5 43,-2.5 44.5,-1 44.5,6 45.612,7.112 XP3.3
VCC: C2.2 D1.4 XP1.2 XP2.7 XP2.8 XP3.5 | length 67.3
  Top Layer w0.762: XP2.8 33.274,3.81 ; v2@31.5,5.868 v2(31.5,6) 32.5,6 33.274,5.226 33.274,3.81 ; XP2.7 33.274,3.81
  Top Layer w1: v2(1.794,-3.91) 2.094,-3.91 2.094,-3.92 XP1.2
  Bottom Layer w1: v2(1.794,-3.91) 3.908,-3.91 6.918,-0.9 C2.2 20.562,-0.9 23.693,2.231 29.606,2.231 31.481,4.106 31.481,5.981 v2(31.5,6) 32.963,6 39.155,12.192 XP3.5
VIN: C1.1 D1.3 XP4.1 XP4.2 XP5.1 XP5.2 XS1.1 XS1.3 | length 19.4
  Bottom Layer w1: XS1.1@24.13,-5 24.53,-5 25.372,-5.842 C1.1 34.78,-1.785 33.611,-0.616 D1.3@33.611,2.082

## Polygon pours and split planes (outlines as drawn)
GND on Top Layer "Top Layer-GND" (solid, remove dead copper, pour order 11): -7.849,-14.884 49.606,-14.884 49.606,14.859 -7.849,14.859
VIN on Top Layer "Top Layer-VIN" (hatched 45Degree grid 0.61 track 0.254, remove dead copper, pour order 10): 16.256,12.446 13.716,9.906 13.716,-10.77 13.64,-10.846 15.24,-12.446 26.162,-12.446 27.686,-10.922 27.686,-4.572 25.654,-2.54 21.59,-2.54 21.59,2.54 25.908,2.54 27.94,4.572 27.686,4.826 27.686,10.922 26.162,12.446
GND on Bottom Layer "Bottom Layer-GND" (solid, remove dead copper, pour order 13): -7.747,14.834 -7.747,-14.91 49.581,-14.91 49.581,14.834

## Keep-outs
Keep-Out Layer:
  lines w0.254: -7.923,-14.899 ccw(c-7.796,-14.899) -7.796,-15.026 ; -7.923,-14.899 ccw(c-7.796,-14.899) -7.796,-15.026 ; -7.923,-14.899 -7.923,-0.643 ; -7.923,-0.643 cw(c-7.796,-0.643) -7.796,-0.516 ; -7.923,-0.643 cw(c-7.796,-0.643) -7.796,-0.516 ; -7.923,0.627 ccw(c-7.796,0.627) -7.796,0.5 ; -7.923,0.627 ccw(c-7.796,0.627) -7.796,0.5 ; -7.923,0.627 -7.923,14.883 ; -7.923,14.883 cw(c-7.796,14.883) -7.796,15.01 ; -7.923,14.883 cw(c-7.796,14.883) -7.796,15.01 ; -7.796,-15.026 49.608,-15.026 ; -7.796,-0.516 -4.856,-0.516 -4.856,0.5 -7.796,0.5 ; -7.796,15.01 49.608,15.01 ; 49.608,-15.026 ccw(c49.608,-14.899) 49.735,-14.899 ; 49.608,-15.026 ccw(c49.608,-14.899) 49.735,-14.899 ; 49.608,15.01 cw(c49.608,14.883) 49.735,14.883 ; 49.608,15.01 cw(c49.608,14.883) 49.735,14.883 ; 49.735,-14.899 49.735,14.883

## Other copper
Top Layer:
  pour cut-out: -3.9,-10.681 -3.9,-8.814 6.8,-8.814 6.8,-10.681 -1.948,-10.681
  pour cut-out: -3.9,10.681 -3.9,8.814 6.8,8.814 6.8,10.681 -1.948,10.681

## Silkscreen, mask and mechanical layers (free items; w line width, h text height)
Top Overlay:
  text "АБВГ.201905.100 Rev 0.1" at -4.425,1.725 h1.5 r90
  text "№________" at 22.1,-7.575 h3.5 r90
  text "АБВГ.201905.010 Rev 0.1" at -4.4,-13.825 h1.5 r90
Board:
  the board outline again, w0.5
Fab Notes:
  text "Диаметр фрезы для обработки контура / подбирается на производстве." at -8.3,-20.9 h2
Assembly Notes:
  text "Монтаж компонентов на плату / производить на линии поверхностного монтажа." at -8.3,-25 h2

## Dimensions
49.608,14.883 to 49.6,-14.899 on Dimensions
-7.796,14.883 to 49.608,14.883 on Dimensions

## Text inside footprints (layer, text, board x,y; h text height)
XS1: Bottom Overlay "1" at 15.625,-5.45 h2 r270; Bottom Overlay "2" at 15.625,-0.45 h2 r270; Bottom Overlay "3" at 15.625,4.55 h2 r270; Bottom Assembly "Screws" at 31.175,-2.125 h1.5 r270; Bottom Assembly "Cable Entry" at 16.25,-3.175 h1.5 r270